# EAGLE board stepperboard1 (EAGLE 7.1.0)
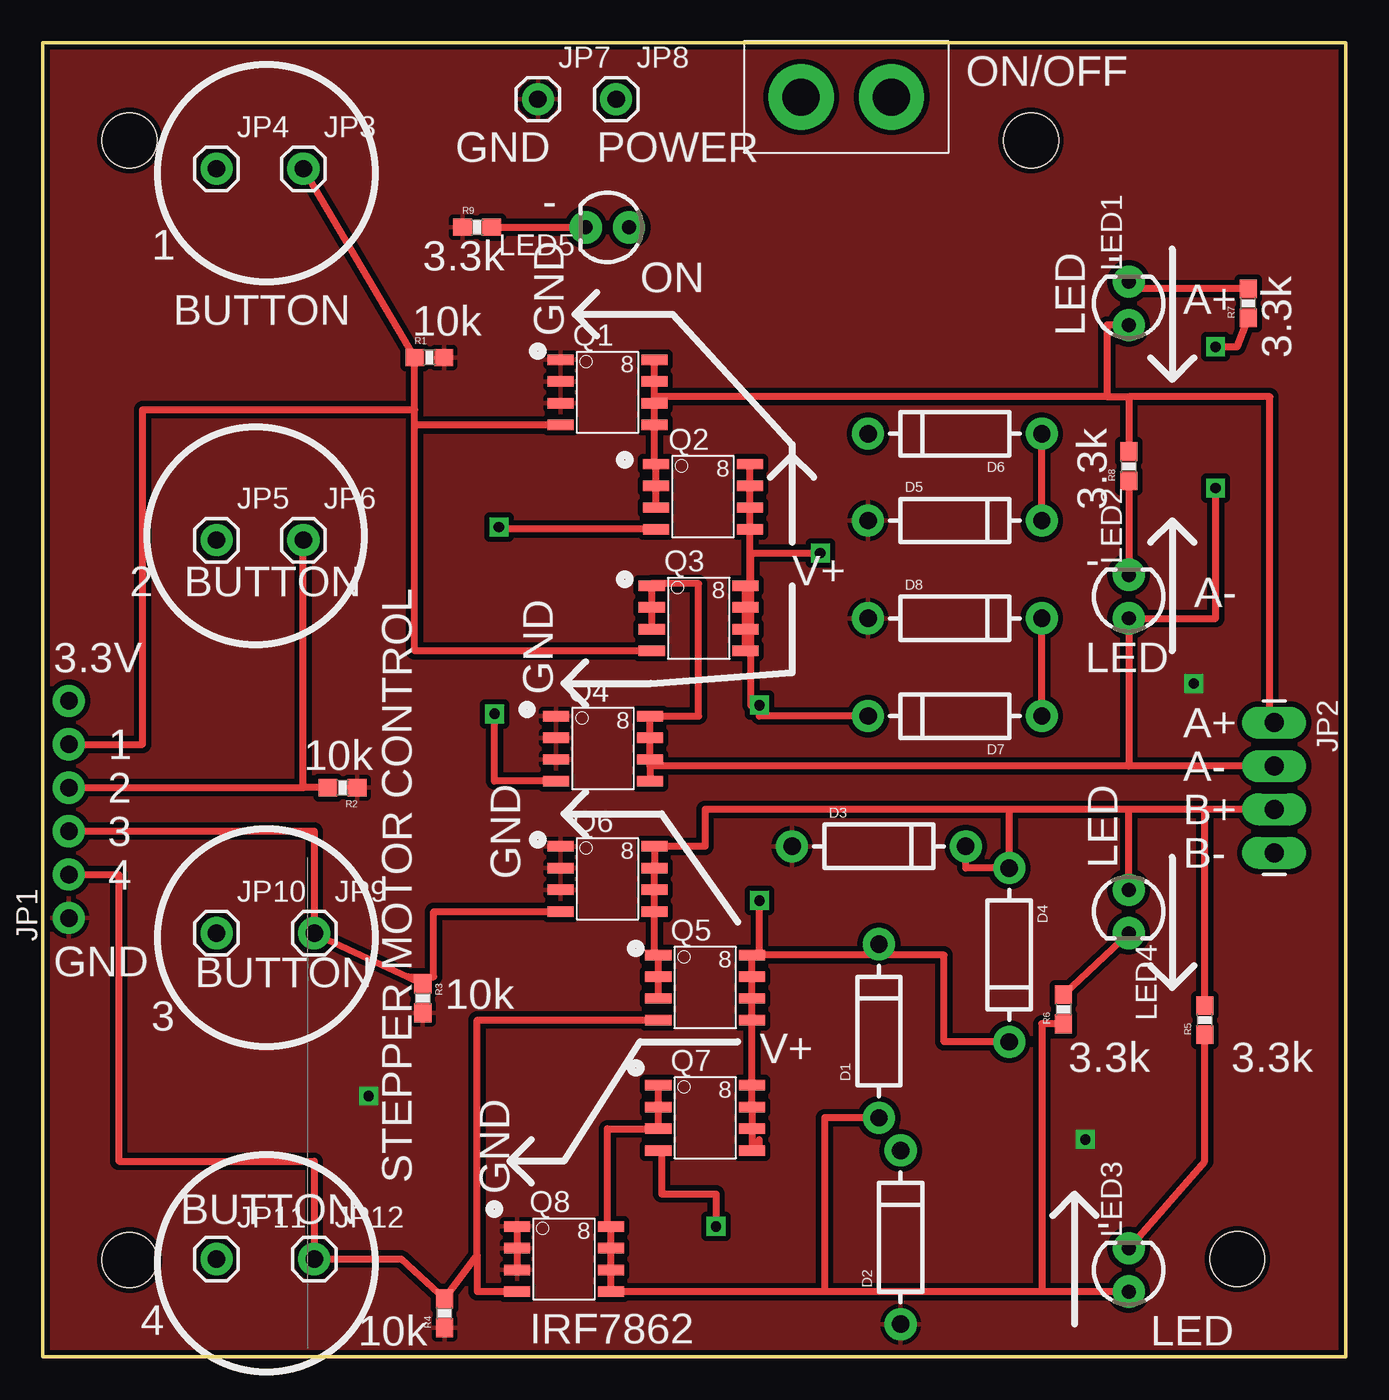
[diagram p0: board, top side]
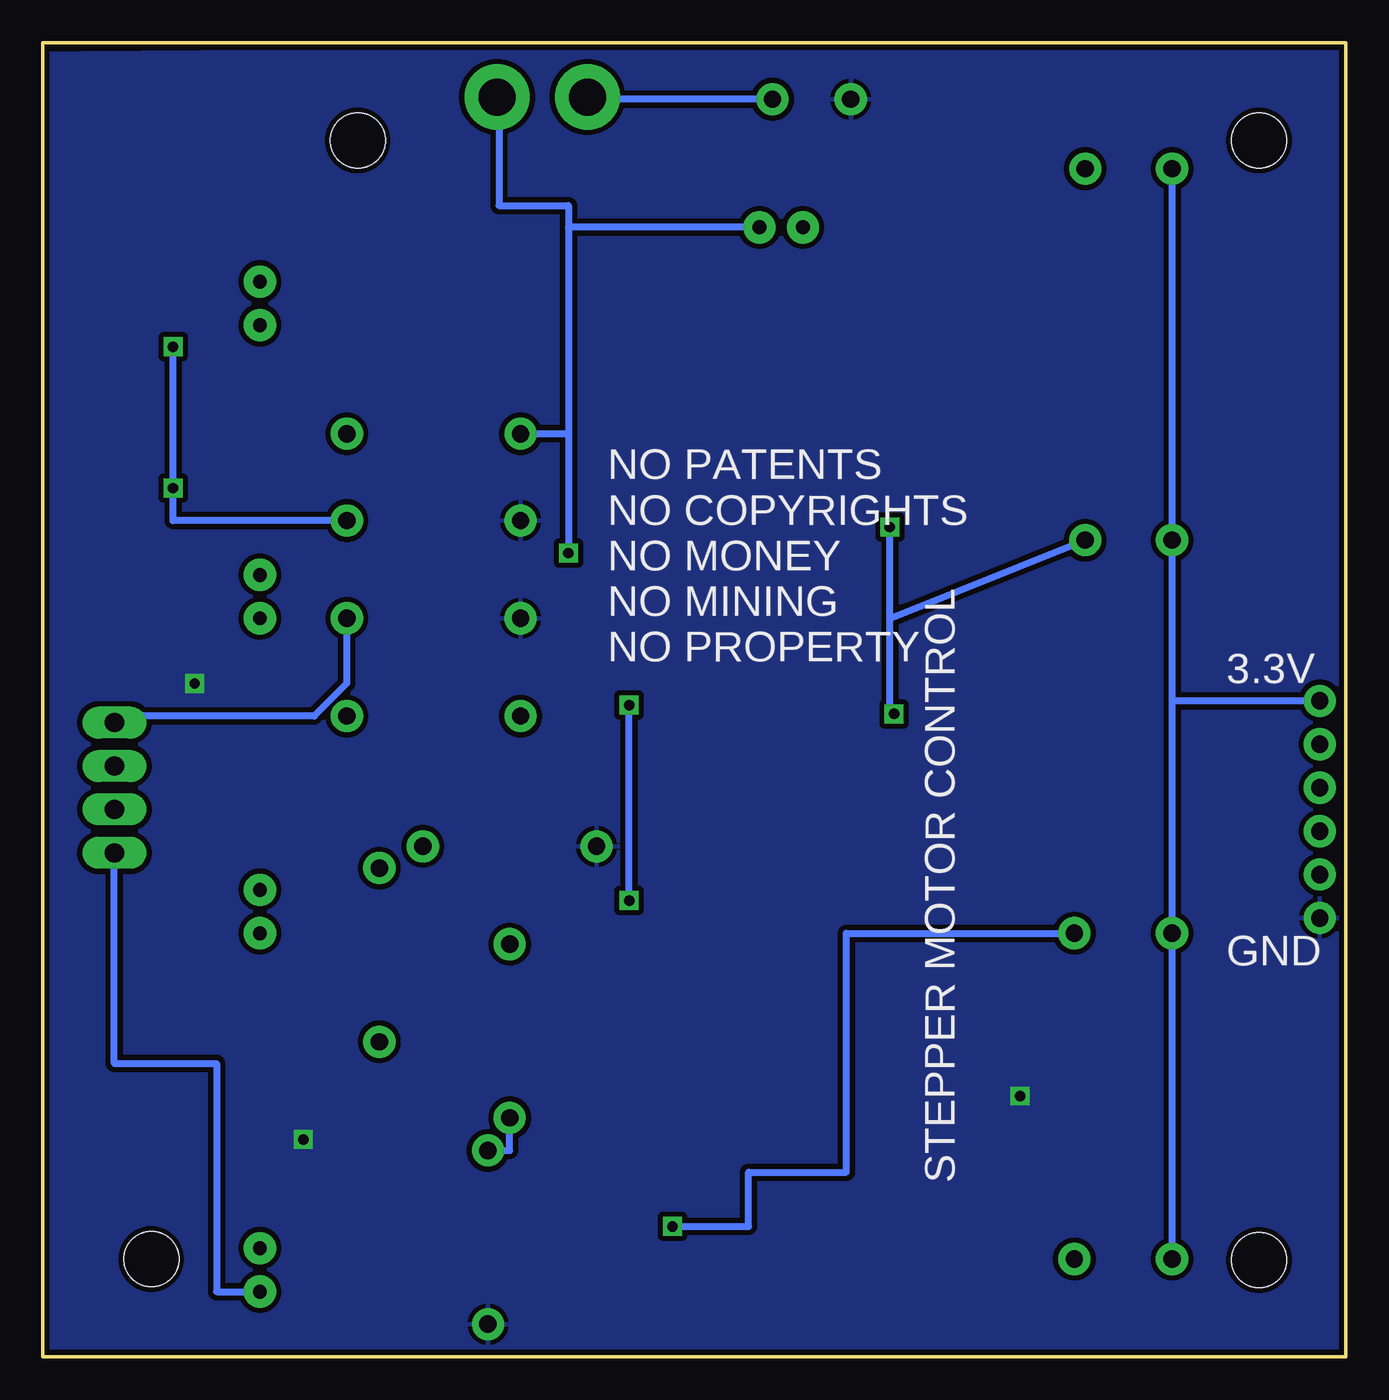
[diagram p1: board, bottom side, seen from below]

Size 76.2 x 76.83 mm. Coordinates in mm from the lower left corner, seen from the top.
Outline: 0,76.83 0,0 76.2,0 76.2,76.83 0,76.83
Copper layers (1*16): Top 0.035mm / dielectric 1.5mm / Bottom 0.035mm
Design rules "SparkFun": minimum track width 8mil, minimum drill 20mil, track to track 8mil, track to pad 8mil, pad to pad 8mil, via to via 8mil, smd to smd 8mil, copper to edge 10mil, drill to drill 8mil, minimum pad ring 12mil, minimum via ring 10mil, stop-mask expansion 4mil, vias tented up to drill 25mil, thermal gap 10mil
Net classes: 0 default: width 0.203 mm; 1 vcc: width 0.254 mm
Holes 3.2 mm at 5.08,71.12 57.78,71.12 5.08,5.65 69.85,5.71

## Footprints (pad centres in the part's own frame; a part is rotated, then mirrored left to right if it is on the bottom)
DIODE-1N4001-KIT = drill 1.016 pad 1.88: A -5.08,0; C 5.08,0
1X06_NO_SILK = drill 1.016 pad 1.88: 1 0,0; 2 2.54,0; 3 5.08,0; 4 7.62,0; 5 10.16,0; 6 12.7,0
1X04_LONGPADS = drill 1.118 pad 1.88 long: 1 0,0; 2 2.54,0; 3 5.08,0; 4 7.62,0
1X01 = drill 1.016 pad 1.88: 1 0,0
LED3MM = drill 0.813 pad 1.88: A -1.27,0; K 1.27,0
SO-8 = smd 1.524 x 0.61: 1 -2.743,1.905; 2 -2.743,0.635; 3 -2.743,-0.635; 4 -2.743,-1.905; 5 2.743,-1.905; 6 2.743,-0.635; 7 2.743,0.635; 8 2.743,1.905
0603-RES = smd 1.1 x 1: 1 -0.85,0; 2 0.85,0
CW182-ND = drill 2.159 pad 3.81: P$1 -2.642,0; P$2 2.642,0

## Placement (x,y rotation side)
D1  [DIODE-1N4001-KIT]  48.9,19.05 90 top
D2  [DIODE-1N4001-KIT]  50.16,6.99 90 top
D3  [DIODE-1N4001-KIT]  48.9,29.84 0 top
D4  [DIODE-1N4001-KIT]  56.52,23.5 270 top
D5  [DIODE-1N4001-KIT]  53.34,48.9 0 top
D6  [DIODE-1N4001-KIT]  53.34,53.98 180 top
D7  [DIODE-1N4001-KIT]  53.34,37.47 180 top
D8  [DIODE-1N4001-KIT]  53.34,43.18 0 top
JP1  [1X06_NO_SILK]  1.52,25.65 90 top
JP2  [1X04_LONGPADS]  72.01,37.08 270 top
JP3  M01PTH  [1X01]  15.24,69.47 0 top
JP4  M01PTH  [1X01]  10.16,69.47 0 top
JP5  M01PTH  [1X01]  10.16,47.75 0 top
JP6  M01PTH  [1X01]  15.24,47.75 0 top
JP7  M01PTH  [1X01]  28.96,73.53 0 top
JP8  M01PTH  [1X01]  33.53,73.53 0 top
JP9  M01PTH  [1X01]  15.88,24.77 0 top
JP10  M01PTH  [1X01]  10.16,24.77 0 top
JP11  M01PTH  [1X01]  10.16,5.71 0 top
JP12  M01PTH  [1X01]  15.88,5.71 0 top
LED1  [LED3MM]  63.5,61.59 90 top
LED2  [LED3MM]  63.5,44.45 90 top
LED3  [LED3MM]  63.5,5.08 90 top
LED4  [LED3MM]  63.5,26.04 270 top
LED5  [LED3MM]  33.02,66.04 180 top
Q1  FDS5680  [SO-8]  33.02,56.39 0 top
Q2  FDS5680  [SO-8]  38.61,50.29 0 top
Q3  FDS5680  [SO-8]  38.35,43.18 0 top
Q4  FDS5680  [SO-8]  32.77,35.56 0 top
Q5  FDS5680  [SO-8]  38.73,21.59 0 top
Q6  FDS5680  [SO-8]  33.02,27.94 0 top
Q7  FDS5680  [SO-8]  38.73,13.97 0 top
Q8  FDS5680  [SO-8]  30.48,5.71 0 top
R1  10k  [0603-RES]  22.61,58.42 0 top
R2  10k  [0603-RES]  17.53,33.27 180 top
R3  10k  [0603-RES]  22.23,20.95 270 top
R4  10k  [0603-RES]  23.5,2.54 90 top
R5  3.3k  [0603-RES]  67.94,19.68 90 top
R6  3.3k  [0603-RES]  59.69,20.32 90 top
R7  3.3k  [0603-RES]  70.48,61.59 90 top
R8  3.3k  [0603-RES]  63.5,52.07 90 top
R9  3.3k  [0603-RES]  25.4,66.04 0 top
U$5  CW182-ND  [CW182-ND]  46.99,73.66 0 top

## Library data of the parts
D1-D8 = SparkFun-DiscreteSemi
JP1-JP12 = SparkFun-Connectors
LED1-LED5 = SparkFun-LED
Q1-Q8 = transistor-fet
R1-R9 = SparkFun-Passives
U$5 = spietz-library

## Nets
12V: D1.C D4.C D6.C D7.C LED5.A Q2.5 Q2.6 Q2.7 Q2.8 Q3.5 Q3.6 Q3.7 Q3.8 Q5.5 Q5.6 Q5.7 Q5.8 Q7.5 Q7.6 Q7.7 Q7.8 U$5.P$2
A+: D7.A D8.C JP2.1 LED1.A Q1.5 Q1.6 Q1.7 Q1.8 Q2.1 Q2.2 Q2.3 R8.2
A-: D5.C D6.A JP2.2 LED2.A Q3.1 Q3.2 Q3.3 Q4.5 Q4.6 Q4.7 Q4.8 R7.1
B+: D3.C D4.A JP2.3 LED4.A Q5.1 Q5.2 Q5.3 Q6.5 Q6.6 Q6.7 Q6.8 R5.2
B-: D1.A D2.C JP2.4 LED3.A Q7.1 Q7.2 Q7.3 Q8.5 Q8.6 Q8.7 Q8.8 R6.1
GND: D2.A D3.A D5.A D8.A JP1.1 JP7.1 Q1.1 Q1.2 Q1.3 Q4.1 Q4.2 Q4.3 Q6.1 Q6.2 Q6.3 Q8.1 Q8.2 Q8.3 R1.2 R2.1 R3.2 R4.1 R9.1
N$1: LED1.K R7.2
N$6: JP1.5 JP3.1 Q1.4 Q3.4 R1.1
N$7: JP1.4 JP6.1 Q2.4 Q4.4 R2.2
N$8: LED2.K R8.1
N$9: LED3.K R5.1
N$10: LED4.K R6.2
N$13: JP1.3 JP9.1 Q6.4 Q7.4 R3.1
N$14: JP1.2 JP12.1 Q5.4 Q8.4 R4.2
N$15: JP8.1 U$5.P$1
N$16: LED5.K R9.2
V3.3: JP1.6 JP4.1 JP5.1 JP10.1 JP11.1

## Tracks (layer width: path | path; a pad name or v marks a point on that pad's centre or on a via)
12V  (via drill 0.6)
  Top 0.406: Q2.8 Q2.7 Q2.6 Q2.5 41.35,45.09 Q3.8 Q3.7 Q3.6 Q3.5 41.4,41.27 | 41.4,41.27 41.4,46.99 v45.47,46.99 | 41.91,12.7 41.91,12.06 Q7.5 Q7.6 Q7.7 Q7.8 Q5.5 Q5.6 Q5.7 Q5.8 | Q5.8 41.91,23.5 v41.91,26.67 | 41.4,41.27 41.4,38.1 v41.91,38.1 41.91,37.47 D7.C | D4.C 52.7,18.41 52.7,23.5 48.9,23.5 | 48.9,23.5 D1.C | 48.9,23.5 Q5.8
  Bottom 0.406: v41.91,26.67 v41.91,38.1 | U$5.P$2 49.53,73.66 49.53,67.31 45.47,67.31 45.47,66.04 | 45.47,66.04 45.47,53.98 | 45.47,53.98 v45.47,46.99 | LED5.A 45.47,66.04 | D6.C 45.47,53.98
A+
  Top 0.406: Q2.3 Q2.2 Q2.1 35.76,52.2 Q1.5 Q1.6 35.76,56.13 | 35.76,56.13 Q1.7 Q1.8 | JP2.1 71.75,37.08 71.75,56.13 63.5,56.13 | 62.23,56.13 35.76,56.13 | LED1.A 62.23,60.33 62.23,56.13 | 62.23,56.13 63.5,56.13 | 63.5,56.13 R8.2 | D7.A D8.C
  Bottom 0.406: D8.C 58.42,39.37 60.33,37.47 72.01,37.47 JP2.1
A-  (via drill 0.6)
  Top 0.406: JP2.2 63.5,34.54 | 63.5,34.54 35.51,34.54 | 35.51,34.54 Q4.5 | 35.51,34.54 Q4.6 Q4.7 Q4.8 38.35,37.47 38.35,45.21 35.61,45.21 Q3.1 Q3.2 Q3.3 | 63.5,34.54 LED2.A 68.58,43.18 v68.58,50.8 | v68.58,59.05 69.85,59.05 R7.1 | D5.C D6.A
  Bottom 0.406: v68.58,59.05 v68.58,50.8 68.58,48.9 D5.C
B+
  Top 0.406: Q5.2 Q5.3 Q5.1 35.76,23.5 Q6.5 Q6.6 Q6.7 Q6.8 38.73,29.84 38.73,32 56.52,32 | JP2.3 67.94,32 | 67.94,32 63.5,32 | 63.5,32 56.52,32 | LED4.A 63.5,32 | R5.2 67.94,32 | D3.C 53.98,28.57 D4.A 56.52,32
B-
  Top 0.406: 33.02,3.81 Q8.5 | Q8.5 Q8.6 Q8.7 Q8.8 33.02,7.62 33.02,13.34 Q7.3 Q7.2 Q7.1 | LED3.A 58.42,3.81 | 58.42,3.81 45.72,3.81 | 45.72,3.81 Q8.5 | R6.1 58.42,19.47 58.42,3.81 | D1.A 45.72,13.97 45.72,3.81
  Bottom 0.406: JP2.4 72.01,17.14 66.04,17.14 66.04,3.81 LED3.A | D2.C 48.9,12.06 D1.A
GND  (via drill 0.6)
  Top 0.406: Q8.1 Q8.2 Q8.3
  other vias: 19.05,15.24 67.31,39.37 60.96,12.7
  pour Top (isolate 0.305): 0,76.83 77.47,76.83 76.2,0 0,0
  pour Bottom (isolate 0.305): 0,76.83 77.47,76.2 76.2,0 0,0
N$1
  Top 0.406: R7.2 63.5,62.45 LED1.K
N$6
  Top 0.406: Q3.4 21.76,41.27 21.76,54.48 | 21.76,54.48 21.76,55.37 | 21.76,55.37 R1.1 JP3.1 | Q1.4 21.76,54.48 | JP1.5 5.84,35.81 5.84,55.37 21.76,55.37
N$7  (via drill 0.6)
  Top 0.406: Q4.4 26.42,33.66 v26.42,37.59 | Q2.4 26.67,48.39 v26.67,48.51 | JP1.4 15.24,33.27 | R2.2 15.24,33.27 | 15.24,33.27 JP6.1
  Bottom 0.406: v26.42,37.59 26.67,37.59 26.67,43.18 | 26.67,43.18 v26.67,48.51 | JP6.1 26.67,43.18
N$8
  Top 0.406: R8.1 LED2.K
N$9
  Top 0.406: LED3.K 67.94,11.43 R5.1
N$10
  Top 0.406: LED4.K R6.2
N$13  (via drill 0.6)
  Top 0.406: JP1.3 15.88,30.73 JP9.1 21.38,22.23 | 21.38,22.23 R3.1 | 21.38,22.23 22.86,22.23 22.86,26.04 Q6.4 | Q7.4 36.2,12.06 36.2,9.53 39.37,9.53 v39.37,7.62
  Bottom 0.406: v39.37,7.62 34.92,7.62 34.92,10.79 29.21,10.79 29.21,24.77 JP9.1
N$14
  Top 0.406: JP1.2 4.45,28.19 4.45,11.43 15.88,11.43 JP12.1 20.95,5.71 R4.2 25.4,5.93 | Q8.4 25.4,3.81 25.4,5.93 | 25.4,5.93 25.4,19.68 Q5.4
N$15
  Bottom 0.406: JP8.1 44.35,73.53 U$5.P$1
N$16
  Top 0.406: R9.2 LED5.K
V3.3
  Bottom 0.406: JP1.6 10.16,38.35 | 10.16,38.35 JP5.1 JP4.1 | JP11.1 JP10.1 10.16,38.35

## Text on the board
tPlace: ON/OFF | GND | POWER | - | 1 | 3.3k | - | ON | A+ | BUTTON | 10k | GND | LED | 3.3k | 3.3k | - | V+ | 2 | BUTTON | A- | 3.3V | LED | GND | A+ | 1 | 10k | A- | 2 | B+ | 3 | LED | B- | GND | 4 | GND | BUTTON | - | 10k | 3 | 3.3k | 3.3k | V+ | BUTTON | STEPPER MOTOR CONTROL | GND | - | IRF7862 | 4 | 10k | LED
bPlace: NO PATENTS / NO COPYRIGHTS / NO MONEY / NO MINING / NO PROPERTY | 3.3V | GND | STEPPER MOTOR CONTROL
tValues: Tent Vias! | Arduino Wee v1.3